# Altium PCB FCM_Integrated.PcbDoc (part 3 of 3)
Units mil, origin at the board's own origin, x right, y up, seen from the top; angles counter-clockwise.
Board outline 6000 x 4366 mil, 4 copper layers (Top Layer, Power, Ground, Bottom Layer), stack 23.756 mil thick; 165 components, 92 nets, 633 pads, 170 vias.
Unrouted connection lines stored in the file: 134.
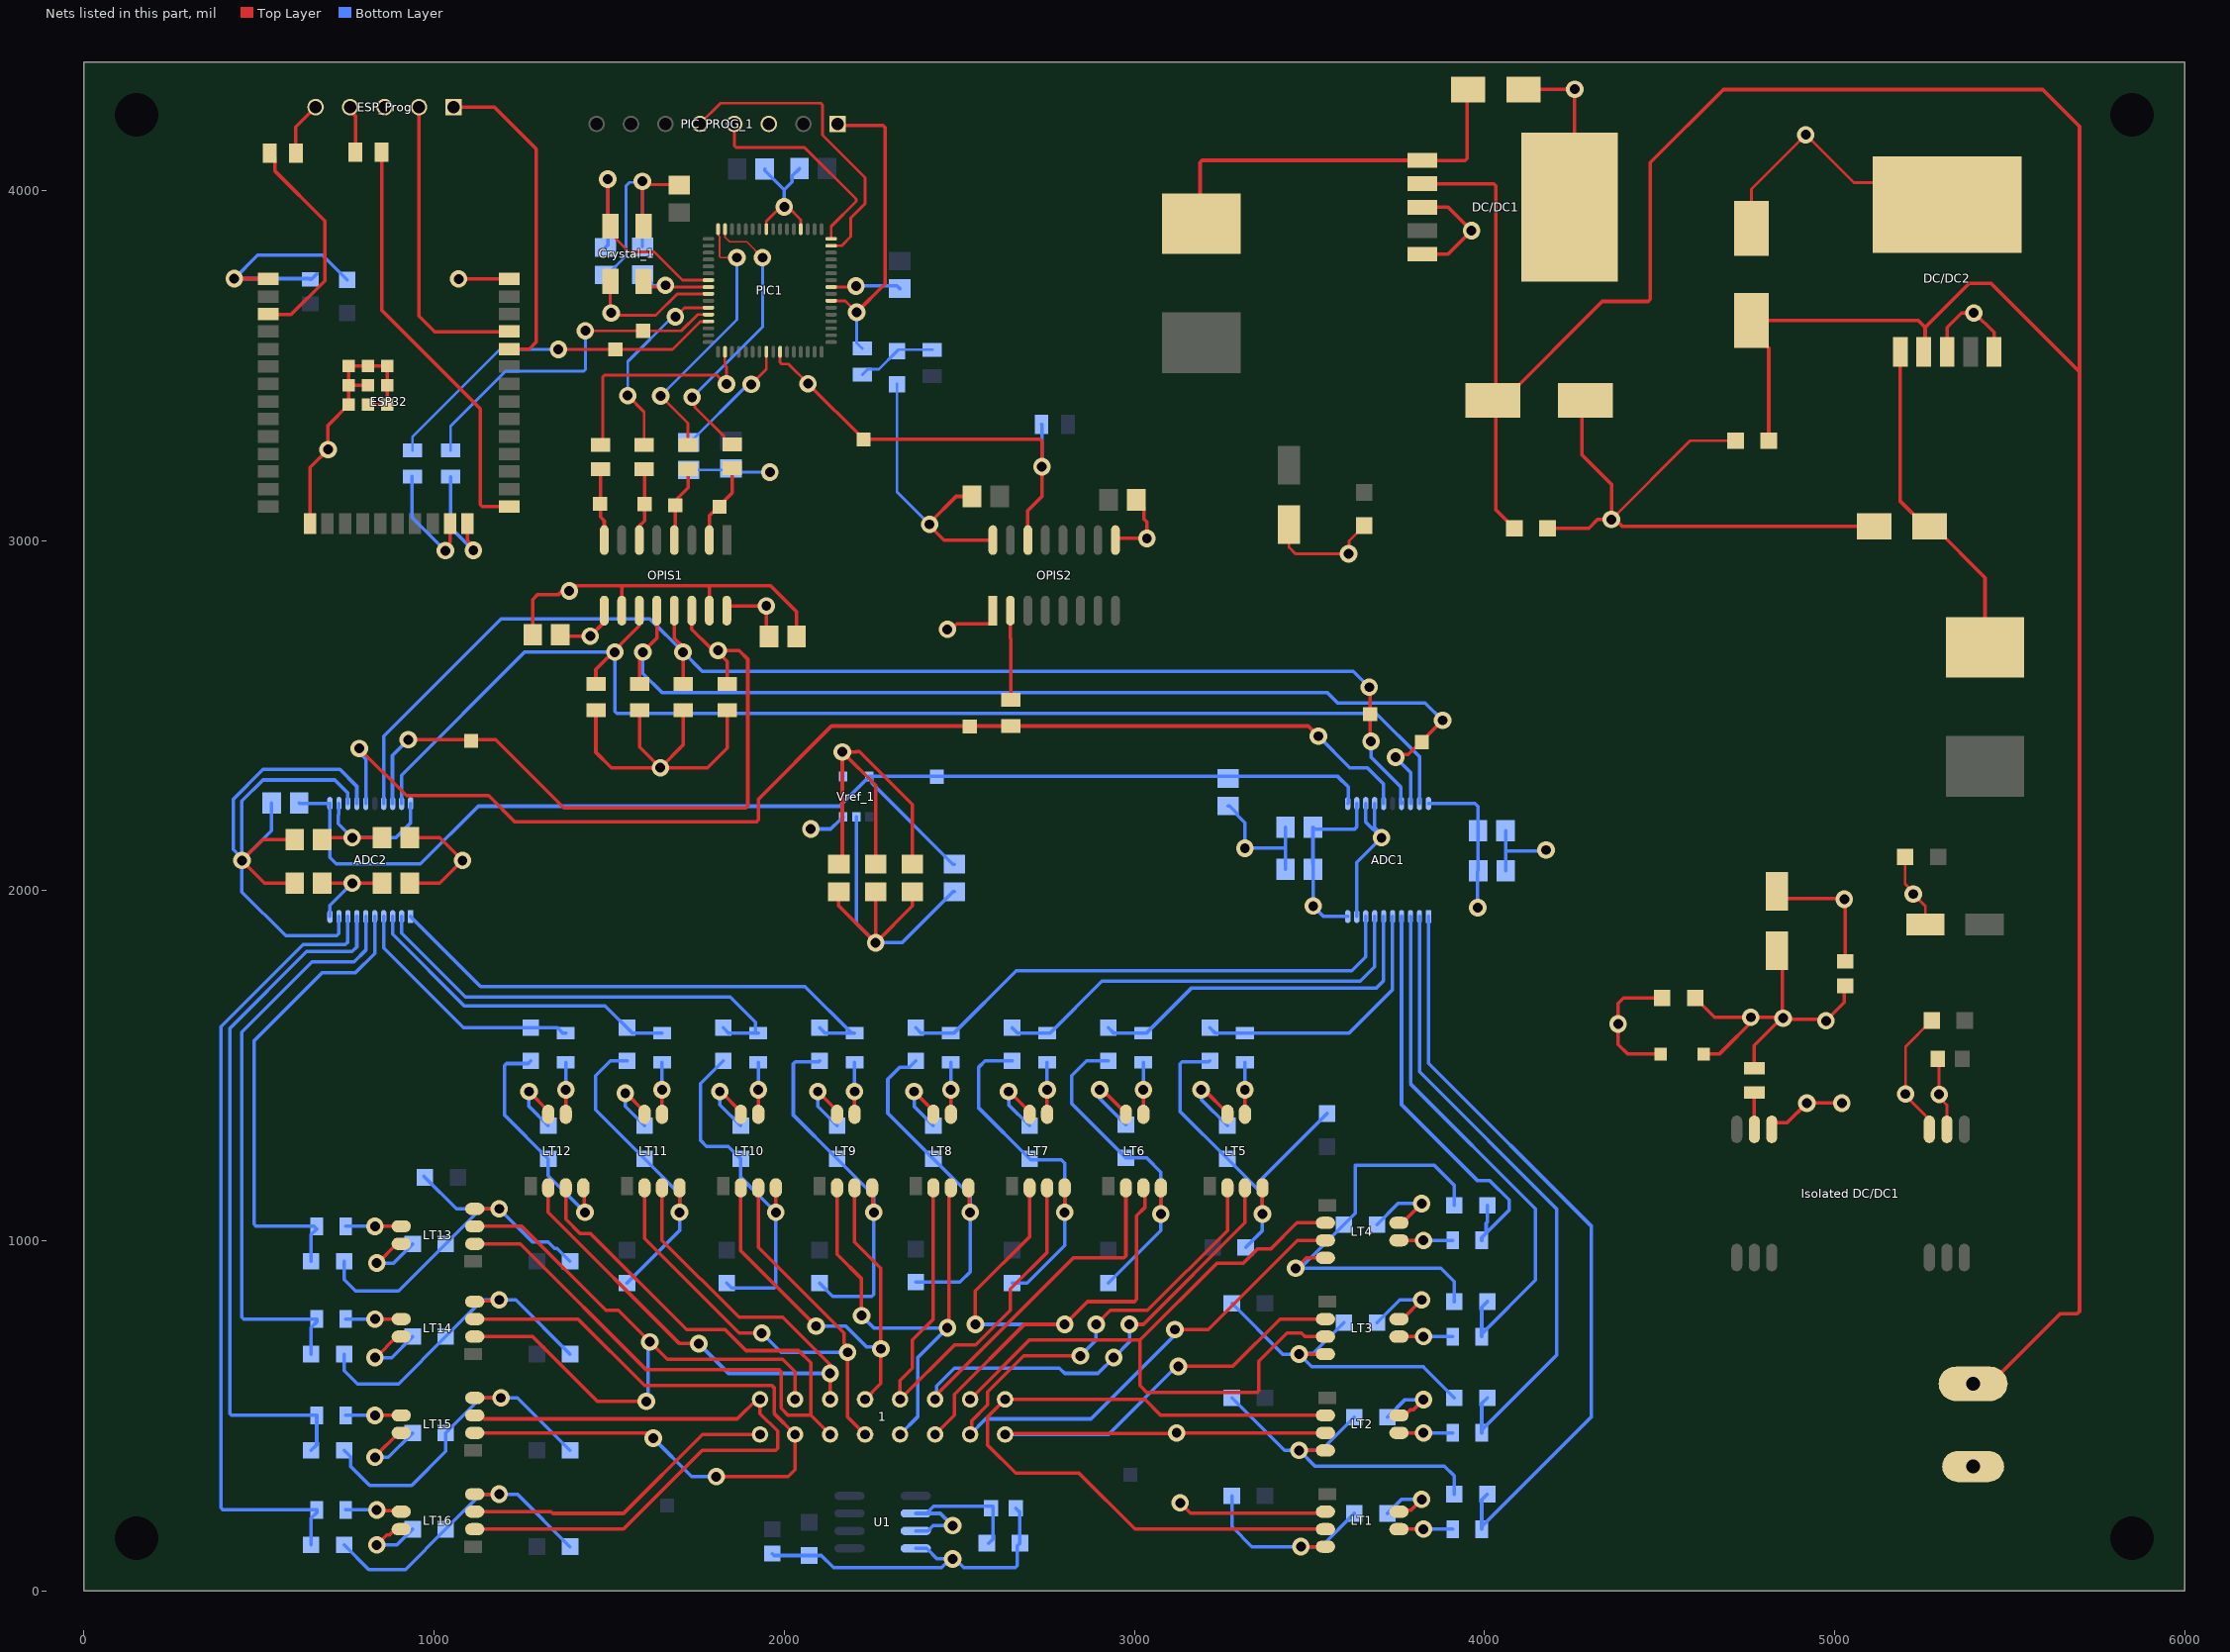
[diagram p4: the nets of this part, all layers, seen from the top]

## Via types
v1: diameter 50, hole 28, Top Layer to Bottom Layer, 170 vias

## Nets (pads, with @x,y where several pads share a name; then routed paths per layer and width w, separated by ;. In a path a pad name is that pad's centre, name@x,y a point inside that pad or via, vN(x,y) a via of type N, cw(c..) or ccw(c..) an arc to the next point about the centre after c; other vN are vias at no path point) (continued)
+5: *1.1 ADC1.10 ADC1.12 ADC1.20 ADC2.10 ADC2.12 ADC2.20 C1.1 C2.1 C3.2 C4.2 C5.2 C6.2 C10.1 C12.2 C13.2 C14.1 C15.1 C16.2 C17.2 C18.1 C19.1 C23.2 C26.2 C29.2 C32.2 C35.2 C38.2 C41.2 C44.2 C47.2 C49.2 C53.2 C55.2 C59.2 C61.2 C65.2 C67.2 C76.1 C77.1 C78.2 DIODE2.K LT1.7 LT2.7 LT3.7 LT4.7 LT5.7 LT6.7 LT7.7 LT8.7 LT9.7 LT10.7 LT11.7 LT12.7 LT13.7 LT14.7 LT15.7 LT16.7 OPIS1.10 OPIS1.15 OPIS2.1 R5.1 R6.1 R7.1 R8.1 U1.2 U1.3 Vref_1.3 Vref_1.4 | length 10591.2
  Top Layer w10: C15.1@680.37,2021 v1(766,2021) C17.2@851.63,2021 ; C14.1@680.37,2146 685.37,2151 v1(766,2151) C16.2@851.63,2151 ; v1(831,381) 831,383.53 898.47,451 LT15.7@906,451 ; v1(831,666) 833.47,666 893.47,726 LT14.7@906,726 ; v1(836,131) 864.28,159.28 872.46,159.28 889.18,176 LT16.7@906,176 ; v1(836,936) 838.47,936 893.47,991 LT13.7@906,991 ; v1(1271,1426) 1326,1371.03 LT12.7@1326,1361 ; C6.2@1281.63,2731 1281.63,2831.63 1296,2846 1356,2846 1381,2871 1541.86,2871 ; R5.1@1462,2515 1462,2395 1506,2351 v1(1646,2351) ; OPIS1.10@1536,2786 1536,2865.14 1541.86,2871 ; v1(1546,1421) 1548.53,1421 1601,1368.53 LT11.7@1601,1361 ; R6.1@1587,2515 1587,2410 v1(1646,2351) ; R7.1@1712,2515 1712,2417 v1(1646,2351) ; OPIS1.15@1786,2786 1786,2865.14 1780.14,2871 ; v1(1816,1426) 1818.53,1426 1876,1368.53 LT10.7@1876,1361 ; R8.1@1837,2515 1837,2407 1781,2351 v1(1646,2351) ; C5.2@2035.37,2726 2035.37,2796.63 1961,2871 1780.14,2871 ; v1(2096,1426) 2151,1371.03 LT9.7@2151,1361 ; C13.2@2156,2075.37 2166,2085.37 v1(2166,2396) ; C10.1@2261,2075.37 2261,2301 v1(2166,2396) ; C12.2@2366,2075.37 2366,2246 2215.14,2396.86 2206.86,2396.86 2206,2396 v1(2166,2396) ; v1(2371,1426) 2426,1371.03 LT8.7@2426,1361 ; v1(2466,2746) 2476.82,2746 2493.12,2762.3 2588.4,2762.3 2596,2769.9 OPIS2.1@2596,2799.82 ; v1(2641,1426) 2643.53,1426 2701,1368.53 LT7.7@2701,1361 ; v1(2901,1431) 2909.29,1431 2976,1364.29 LT6.7@2976,1361 ; v1(3191,1431) 3199.29,1431 3266,1364.29 LT5.7@3266,1361 ; LT1.7@3756,226 3760.78,230.78 3790.78,230.78 v1(3821,261) ; LT2.7@3756,501 3772.82,501 3789.54,517.72 3797.72,517.72 v1(3826,546) ; LT3.7@3756,776 3766.03,776 v1(3821,831) ; LT4.7@3756,1051 3766.03,1051 v1(3821,1106) ; C78.2@4602.18,1693 4657.18,1638 v1@4776,1638 ; DIODE2.K@4626.94,1533 4671,1533 v1@4776,1638 ; *1.1@4771,1493 4771,1558 v1@4851,1638 ; C77.1@4836,1828.35 4851,1813.36 v1@4851,1638 ; C76.1@5031,1728 5028.05,1725.05 5028.05,1680.05 v1(4976,1628) 4971,1633 4856,1633 v1@4851,1638 ; 1541.86,2871 1780.14,2871 ; v1@4776,1638 v1@4851,1638
  Bottom Layer w10: ADC2.10@702.46,1926 702.46,1957.46 v1(766,2021) ; ADC2.12@728.05,2248.83 727.1,2247.88 727.1,2217.1 726,2216 726,2191 v1(766,2151) 891,2151 932.77,2192.77 ADC2.20@932.77,2248.83 ; v1(831,381) 868.76,381 C61.2@938.76,451 ; v1(831,666) 878.76,666 C55.2@938.76,726 ; v1(836,131) 893.76,131 C67.2@938.76,176 ; v1(836,936) 883.76,936 C49.2@938.76,991 ; v1(1271,1426) 1271,1383.24 C65.2@1326,1328.24 ; v1(1546,1421) 1546,1383.24 C59.2@1601,1328.24 ; v1(1816,1426) 1816,1388.24 C53.2@1876,1328.24 ; v1(2076,2176) 2133,2176 2159.22,2202.22 2161.19,2202.22 2168,2209.03 Vref_1.3@2168,2211 ; v1(2096,1426) 2096,1383.24 C47.2@2151,1328.24 ; v1(2166,2396) 2167,2395 2167,2327 Vref_1.4@2168,2326 ; v1(2371,1426) 2371,1383.24 C44.2@2426,1328.24 ; U1.3@2375.49,171 2410.67,171 2425.67,186 v1(2481,186) 2446,221 U1.2@2406.98,221 ; U1.2@2375.49,221 U1.2@2406.98,221 ; C19.1@2583.76,135.03 2596,147.27 2596,241 2426.98,241 U1.2@2406.98,221 ; v1(2641,1426) 2641,1388.24 C41.2@2701,1328.24 ; v1(2901,1431) 2901,1406 C38.2@2976,1331 ; v1(3191,1431) 3191,1403.24 C35.2@3266,1328.24 ; ADC1.10@3609.82,1926 3597.91,1926 ; ADC1.12@3635.41,2248.83 3635.41,2181.77 3629.55,2175.91 3546.09,2175.91 3530.77,2175.91 3515.46,2175.91 C4.2@3510.37,2181 3510.37,2076 3511,2075.37 v1(3511,1956) 3541,1926 3586,1926 ; C29.2@3693.24,766 3758.24,831 v1(3821,831) ; C32.2@3693.24,1046 3753.24,1106 v1(3821,1106) ; C23.2@3723.24,221 3763.24,261 v1(3821,261) ; C26.2@3723.24,496 3773.24,546 v1(3826,546) ; ADC1.20@3840.13,2248.83 3972.94,2248.83 3981.63,2240.14 C3.2@3981.63,2171 3981.63,2056.63 C1.1@3982.26,2056 3981,2054.74 v1(3981,1951) ; 3586,1926 3597.91,1926 ; 3586,1926 3597.91,1926
  other v1: 4853.5,1635.5 4761,1638 1386,2856
+12: C70.2 C71.1 C79.2 C80.1 DC/DC1.2 DC/DC2.2 J1.1 | length 8846.9
  Top Layer w10: DC/DC1.2@3823,4018.86 4027.14,4018.86 4033,4013 4033,3408.78 C71.1@4024.22,3400 ; C70.2@4085.76,3035 4033,3087.76 4033,3391.22 C71.1@4024.22,3400 ; C79.2@4812.24,3285 4812.24,3549.26 4763,3598.5 C80.1@4763,3628 5240,3628 5259,3609 ; DC/DC2.2@5255.07,3538.92 5259,3542.85 5259,3609 ; J1.1@5396,591.22 5445.21,591.22 5645.99,792 5694.14,792 5700,797.86 5700,3482 ; C71.1@4024.22,3400 4053.72,3400 4336.72,3683 4468.14,3683 4474,3688.86 4474,4079 4683,4288 5595,4288 5700,4183 5700,3482 ; 5259,3609 5385,3735 5447,3735 5700,3482
CathH1: OPIS1.2 pad.1@1815,3096 R4.1 | length 245.7
  Top Layer w10: OPIS1.2@1786,2987.18 1786,3071 1851,3136 R4.1@1851,3206
CathH2: OPIS1.4 pad.1@1689,3101 R3.1 | length 233.7
  Top Layer w10: OPIS1.4@1686,2987.18 1688.91,2990.09 1688.91,3113.91 1726,3151 1726,3202.85 R3.1@1724.94,3203.91
CathH3: OPIS1.6 pad.1@1601,3104 R2.1 | length 223.4
  Top Layer w10: OPIS1.6@1586,2987.18 1586,3041 1601,3056 1601,3202.85 R2.1@1599.94,3203.91
CathH4: OPIS1.8 pad.1@1474,3105 R1.1 | length 221.3
  Top Layer w10: R1.1@1474.94,3203.91 1474.94,3067.06 1486,3056 OPIS1.8@1486,2987.18
CathL1: OPIS2.2 R11.2 | length 255.2
  Top Layer w10: OPIS2.2@2646,2799.82 2646,2721 2647,2720 R11.2@2647,2545
Cell_1_Voltage: ADC1.1 C24.2 R16.2 | length 2171.6
  Bottom Layer w10: ADC1.1@3840.13,1926 3840.13,1506.87 4306,1041 4306,497.54 R16.2@3992.34,183.87 ; R16.2@3992.34,176 R16.2@3992.34,183.87 ; C24.2@4008.24,276 3992.34,260.09 R16.2@3992.34,183.87
Cell_2_Voltage: ADC1.2 C27.2 R17.2 | length 1824.4
  Bottom Layer w10: ADC1.2@3814.54,1926 3814.54,1482.46 4206,1091 4206,672.54 R17.2@3992.34,458.87 ; R17.2@3992.34,451 R17.2@3992.34,458.87 ; C27.2@4008.24,551 3992.34,535.09 R17.2@3992.34,458.87
Cell_3_Voltage: ADC1.3 C30.2 R18.2 | length 1510.3
  Bottom Layer w10: ADC1.3@3788.95,1926 3788.95,1448.05 4146,1091 4146,887.54 R18.2@3992.34,733.87 ; R18.2@3992.34,726 R18.2@3992.34,733.87 ; C30.2@4008.24,826 3992.34,810.09 R18.2@3992.34,733.87
Cell_4_Voltage: ADC1.4 C33.2 R19.2 | length 1186.2
  Bottom Layer w10: ADC1.4@3763.36,1926 3763.36,1388.64 3981,1171 4016,1171 4071,1116 4071,1087.54 R19.2@4005.05,1021.59 ; R19.2@3992.34,1001 3992.34,1008.87 R19.2@4005.05,1021.59 ; C33.2@4008.24,1101 4008.24,1053.58 4005.05,1050.39 R19.2@4005.05,1021.59
Cell_5_Voltage: ADC1.5 C36.2 R20.2 | length 788.5
  Bottom Layer w10: C36.2@3216,1608.24 3231.91,1592.34 R20.2@3316,1592.34 3612.34,1592.34 3737.77,1717.77 ADC1.5@3737.77,1926
Cell_6_Voltage: ADC1.6 C39.2 R21.2 | length 1038.7
  Bottom Layer w10: C39.2@2926,1608.24 2941.91,1592.34 R21.2@3026,1592.34 3033.87,1592.34 3162.54,1721 3691,1721 3712.18,1742.18 ADC1.6@3712.18,1926
Cell_7_Voltage: ADC1.7 C42.2 R22.2 | length 1264.8
  Bottom Layer w10: C42.2@2651,1608.24 2666.91,1592.34 R22.2@2751,1592.34 2758.87,1592.34 2907.54,1741 3645.73,1741 3686.59,1781.86 ADC1.7@3686.59,1926
Cell_8_Voltage: ADC1.8 C45.2 R23.2 | length 1497.2
  Bottom Layer w10: C45.2@2376,1608.24 2391.91,1592.34 R23.2@2476,1592.34 2483.87,1592.34 2662.54,1771 3621,1771 3661,1811 ADC1.8@3661,1926
Cell_9_Voltage: ADC2.1 C50.2 R24.2 | length 1505.1
  Bottom Layer w10: ADC2.1@932.77,1926 1132.77,1726 2059.46,1726 R24.2@2193.13,1592.34 ; C50.2@2101,1608.24 2116.91,1592.34 R24.2@2193.13,1592.34 ; R24.2@2201,1592.34 R24.2@2193.13,1592.34
Cell_10_Voltage: ADC2.2 C56.2 R26.2 | length 1302.3
  Bottom Layer w10: ADC2.2@907.18,1926 907.18,1878.1 1089.28,1696 1846,1696 1918.13,1623.87 R26.2@1918.13,1592.34 ; C56.2@1826,1608.24 1841.91,1592.34 R26.2@1918.13,1592.34 ; R26.2@1926,1592.34 R26.2@1918.13,1592.34
Cell_11_Voltage: ADC2.3 C62.2 R28.2 | length 937.3
  Bottom Layer w10: ADC2.3@881.59,1926 881.59,1875.41 1086,1671 1488.24,1671 1566.91,1592.34 R28.2@1651,1592.34
Cell_12_Voltage: ADC2.4 C68.2 R30.2 | length 710.9
  Bottom Layer w10: ADC2.4@856,1926 856,1836 1083.76,1608.24 C68.2@1276,1608.24 1352.22,1608.24 1368.13,1592.34 R30.2@1376,1592.34
Cell_13_Voltage: ADC2.5 C51.2 R25.2 | length 1360.5
  Bottom Layer w10: C51.2@648.76,941 648.76,1017.22 664.66,1033.13 656.79,1041 491.86,1041 486,1046.86 486,1571 681,1766 776,1766 830.41,1820.41 ADC2.5@830.41,1926
Cell_14_Voltage: ADC2.6 C57.2 R27.2 | length 1683.7
  Bottom Layer w10: C57.2@648.76,676 648.76,752.22 664.66,768.13 R27.2@664.66,776 456.86,776 451,781.86 451,1596 651,1796 771,1796 804.82,1829.82 ADC2.6@804.82,1926
Cell_15_Voltage: ADC2.7 C63.2 R29.2 | length 2003.4
  Bottom Layer w10: C63.2@648.76,401 664.66,416.91 R29.2@664.66,501 421.86,501 416,506.86 416,1606 636,1826 766,1826 779.23,1839.23 ADC2.7@779.23,1926
Cell_16_Voltage: ADC2.8 C69.2 R31.2 | length 2292.3
  Bottom Layer w10: C69.2@648.76,131 648.76,207.22 664.66,223.13 R31.2@664.66,231 396.86,231 391,236.86 391,1611 626,1846 746,1846 753.64,1853.64 ADC2.8@753.64,1926
Chipsel1_HS: ADC1.18 OPIS1.12 pad.1@3821,2424 R6.2 | length 2944.7
  Top Layer w10: R6.2@1587,2590 1587,2672 v1(1596,2681) 1636,2721 OPIS1.12@1636,2786 ; v1(3746.22,2380.78) 3753.88,2388.43 3782.88,2388.43 v1(3880.72,2486.28)
  Bottom Layer w10: v1(1596,2681) 1596,2621 1651,2566 3551,2566 3581,2536 3831,2536 v1(3880.72,2486.28) ; v1(3746.22,2380.78) 3788.95,2338.05 ADC1.18@3788.95,2248.83
Chipsel1_LS: PIC1.43 R2.2 | length 552
  Top Layer w8: v1(1553,3414) 1599.94,3367.06 R2.2@1599.94,3272.81 ; v1(1689,3639) 1689.38,3639 1715.35,3664.97 PIC1.43@1783.58,3664.97
  Bottom Layer w8: v1(1553,3414) 1553,3511 1681,3639 v1(1689,3639)
Chipsel2_HS: ADC2.18 OPIS1.14 pad.1@1106,2428 R8.2 | length 2027.7
  Top Layer w10: v1(926,2431) 1176,2431 1371,2236 1890.14,2236 1896,2241.86 1896,2661 1871,2686 v1(1811,2686) 1803.35,2693.65 1788.35,2693.65 1736,2746 OPIS1.14@1736,2799.82 ; v1@1808.5,2683.5 1837,2655 R8.2@1837,2590
  Bottom Layer w10: ADC2.18@881.59,2248.83 881,2249.42 881,2386 v1(926,2431)
Chipsel2_LS: PIC1.31 R4.2 | length 822.6
  Top Layer w5: PIC1.31@1830.85,3889.35 1830.85,3866.15 1844,3853 1893,3853 v1(1938,3808)
  Top Layer w8: v1(1737,3409) 1745.04,3400.96 1745.04,3380.86 1827.44,3298.46 1827.44,3290.58 1843.13,3274.9 R4.2@1851,3274.9
  Bottom Layer w8: v1(1737,3409) 1938,3610 v1(1938,3808)
D_CLK_LS: PIC1.50 R1.2 | length 640.4
  Top Layer w8: R1.2@1474.94,3272.81 1482,3279.87 1482,3467.31 1486.69,3472 1807.67,3472 1832.67,3447 v1(1835,3447) 1835,3496 1830,3501 PIC1.50@1830,3522.64
D_In_HS: ADC1.17 ADC2.17 OPIS1.13 pad.1@3673.5,2503.5 R7.2 | length 3806.4
  Top Layer w10: OPIS1.13@1686,2786 1686,2721 1712,2695 R7.2@1712,2590 ; v1(3671,2581) 3673.5,2578.5 3673.5,2428.5 v1(3676,2426)
  Bottom Layer w10: ADC2.17@856,2248.83 856,2441 1191,2776 1616,2776 v1(1711,2681) 1766,2626 3626,2626 v1(3671,2581) ; v1(3676,2426) 3676,2381 3761,2296 3761,2256 3766,2251 3765.53,2251 ADC1.17@3763.36,2248.83
D_in_LS: PIC1.32 R3.2 | length 788.7
  Top Layer w5: PIC1.32@1811.17,3889.35 1812.32,3888.2 1812.32,3871.68 1815.5,3868.5 1815.5,3810.93 1818.43,3808 v1(1865,3808)
  Top Layer w8: v1(1647,3413) 1724.94,3335.06 R3.2@1724.94,3272.81
  Bottom Layer w8: v1(1647,3413) 1865,3631 v1(1865,3808)
D_out_HS: ADC1.15 ADC2.15 pad.1@2530,2469 R11.1 | length 3450.7
  Top Layer w10: v1(786,2406) 921,2271 1156,2271 1231,2196 1920.14,2196 1926,2201.86 1926,2261 2135,2470 3497,2470 v1(3526,2441)
  Bottom Layer w10: v1(786,2406) 786,2395.18 804.82,2376.36 ADC2.15@804.82,2248.83 ; v1(3526,2441) 3616,2351 3666,2351 3712.18,2304.82 ADC1.15@3712.18,2248.83
D_out_L: OPIS2.14 pad.1@2227,3289 PIC1.58 R9.1 | length 1278.1
  Top Layer w8: PIC1.58@1988,3525.26 1988,3508.69 1992.69,3504 2012,3504 v1(2068,3448)
  Top Layer w10: v1(2068,3448) pad.1@2227,3289 2730.14,3289 2736,3283.14 v1(2736,3211) 2736,3126 2696,3086 OPIS2.14@2696,3001
  Bottom Layer w10: R9.1@2735,3332 2736,3331 v1(2736,3211)
DCLK_HS: ADC1.19 ADC2.19 OPIS1.11 R5.2 | length 3737.5
  Top Layer w10: R5.2@1462,2590 1462,2632 1586,2756 OPIS1.11@1586,2786
  Bottom Layer w10: ADC2.19@907.18,2248.83 907.18,2329.82 1258.36,2681 v1(1516,2681) 1516,2511.86 1521.86,2506 3691,2506 3814.54,2382.46 ADC1.19@3814.54,2248.83
ESP_Boot_D: ESP32.25 R32.1 | length 1208.4
  Top Layer w10: R32.1@850,4109 850,3658 1132,3376 1132,3102.86 1137.86,3097 ESP32.25@1215,3097
ESP_Boot_P: ESP_Prog.4 R32.2 | length 135.2
  Top Layer w10: ESP_Prog.4@760,4238 760,4227.92 775,4212.92 R32.2@775,4109
ESP_Enable_D: ESP32.3 R15.2 | length 633.4
  Top Layer w10: ESP32.3@526.02,3647 528.02,3645 591,3645 688,3742 688,3913 544.69,4056.31 544.69,4092.31 R15.2@530,4107
ESP_Enable_P: ESP_Prog.5 R15.1 | length 154.4
  Top Layer w10: R15.1@605,4107 605,4181.43 ESP_Prog.5@661.57,4238
ESP_TX_BOOT: ESP32.35 ESP_Prog.2 | length 874.1
  Top Layer w10: ESP_Prog.2@956.85,4238 956.85,3641.15 1002,3596 1214,3596 ESP32.35@1215,3597
ESPout-PICin: pad.1@1597,3599 PIC1.44 R10.2 | length 1003.1
  Top Layer w8: v1(1432,3599) 1706,3599 1752.26,3645.26 PIC1.44@1783.61,3645.26
  Bottom Layer w8: R10.2@1047,3257 1047,3327 1204,3484 1427.31,3484 1432,3488.69 v1(1432,3599)
GND: 
GND_H: "Isolated DC/DC1.4" ADC1.9 ADC1.13 ADC1.14 ADC2.9 ADC2.13 ADC2.14 C1.2 C2.2 C3.1 C4.1 C5.1 C6.1 C10.2 C11.1 C12.1 C13.1 C14.2 C15.2 C16.1 C17.1 C18.2 C19.2 C20.1 C21.2 C22.1 C23.1 C24.1 C25.1 C26.1 C27.1 C28.1 C29.1 C30.1 C31.1 C32.1 C33.1 C34.1 C35.1 C36.1 C37.1 C38.1 C39.1 C40.1 C41.1 C42.1 C43.1 C44.1 C45.1 C46.1 C47.1 C48.1 C49.1 C50.1 C51.1 C52.1 C53.1 C54.1 C55.1 C56.1 C57.1 C58.1 C59.1 C60.1 C61.1 C62.1 C63.1 C64.1 C65.1 C66.1 C67.1 C68.1 C69.1 C76.2 C77.2 C78.1 C93.1 C94.1 DIODE2.A LT1.2 LT1.4 LT2.4 LT3.4 LT4.4 LT5.4 LT6.4 LT7.4 LT8.4 LT9.4 LT10.4 LT11.4 LT12.4 LT13.4 LT14.4 LT15.4 LT16.4 OPIS1.9 OPIS1.16 pad.2 U1.4 Vref_1.2 | length 23408.9
  Top Layer w10: C15.2@601.63,2021 516,2021 v1(451,2086) 511,2146 C14.2@601.63,2146 ; C17.1@930.37,2021 1016,2021 v1(1081,2086) 1016,2151 C16.1@930.37,2151 ; LT16.4@1116,276 v1(1186,276) ; LT15.4@1116,551 v1(1191,551) ; LT14.4@1116,826 1118.5,828.5 1183.5,828.5 v1(1186,831) ; LT13.4@1116,1091 v1(1186,1091) ; C6.1@1360.37,2731 1364.37,2727 v1(1446,2727) 1486,2767 OPIS1.9@1486,2799.82 ; LT12.4@1426,1151 1428.5,1148.5 1428.5,1083.5 v1(1431,1081) ; v1(1701,1081) LT11.4@1701,1151 ; OPIS1.16@1836,2799.82 1836,2805.98 1843.02,2813 v1(1949,2813) 1949,2733.63 C5.1@1956.63,2726 ; v1(1976,1081) LT10.4@1976,1151 ; C13.1@2156,1996.63 2156,1956 v1(2261,1851) ; LT9.4@2251,1151 2253.5,1148.5 2253.5,1083.5 v1(2256,1081) ; C10.2@2261,1996.63 v1(2261,1851) ; C12.1@2366,1996.63 2366,1956 v1(2261,1851) ; LT8.4@2526,1151 2528.5,1148.5 2528.5,1083.5 v1(2531,1081) ; v1(2801,1081) LT7.4@2801,1151 ; v1(3076,1076) LT6.4@3076,1151 ; v1(3131,251) 3160.78,221.22 3541.22,221.22 LT1.2@3546,226 ; v1(3366,1076) LT5.4@3366,1151 ; v1(3461,921) 3491,951 LT4.4@3546,951 ; v1(3471,401) LT2.4@3546,401 ; v1(3471,676) LT3.4@3546,676 ; v1(3476,126) LT1.4@3546,126 ; DIODE2.A@4502.93,1533 4409.86,1533 4382,1560.86 4382,1677.28 4397.72,1693 C78.1@4507.69,1693 ; 4821,1318 4821,1326.69 4830.93,1336.62 4864.62,1336.62 v1(4921,1393) v1(5021,1393) ; C77.2@4836,1997.65 4855.65,1978 5025.14,1978 5031,1972.14 C76.2@5031,1798
  Bottom Layer w10: C94.1@535.63,2250 535.63,2170.63 v1(451,2086) ; ADC2.9@728.05,1926 728.05,1876.86 722.19,1871 576,1871 451,1996 v1(451,2086) ; C69.1@743.24,131 813.24,61 918.24,61 C67.1@1033.24,176 1133.24,276 v1(1186,276) 1238.24,276 C66.1@1388.24,126 ; C63.1@743.24,401 761.87,382.38 761.87,355.13 816,301 936,301 1033.24,398.24 C61.1@1033.24,451 1133.24,551 v1(1191,551) 1238.24,551 C60.1@1388.24,401 ; C57.1@743.24,676 743.24,628.76 781,591 898.24,591 C55.1@1033.24,726 1138.24,831 v1(1186,831) 1233.24,831 C54.1@1388.24,676 ; C51.1@743.24,941 743.24,888.76 776,856 898.24,856 C49.1@1033.24,991 1133.24,1091 ; ADC2.13@753.64,2248.83 753.64,2278.36 716,2316 511,2316 451,2256 v1@451,2092.57 ; ADC2.14@779.23,2248.83 779.23,2297.77 731,2346 511,2346 426,2261 426,2117.57 v1@451,2092.57 ; C64.1@971,1183.76 C64.1@973.76,1181 1063.76,1091 1133.24,1091 ; C68.1@1276,1513.76 1268.24,1506 1206.86,1506 1201,1500.14 1201,1358.76 C65.1@1326,1233.76 1326,1186 v1(1431,1081) ; C48.1@1388.24,941 1351.43,977.81 1344.19,977.81 1326,996 1281,996 v1(1186,1091) 1133.24,1091 ; C58.1@1551,878.76 1701,1028.76 v1(1701,1081) 1701,1133.76 C59.1@1601,1233.76 1461,1373.76 1461,1471 1503.76,1513.76 C62.1@1551,1513.76 ; C56.1@1826,1513.76 1761,1448.76 1761,1286.86 1778.24,1269.62 1840.14,1269.62 C53.1@1876,1233.76 1876,1181 v1(1976,1081) 1976,871 1976.86,870.14 1971.86,865.14 1849.61,865.14 C52.1@1836,878.76 ; C21.2@1966,106 1971.25,100.75 C20.1@2071,100.75 2106.25,100.75 2141,66 2449.43,66 v1@2474.43,91 ; C46.1@2101,878.76 2138.76,841 2250.14,841 2256,846.86 v1(2256,1081) 2256,1128.76 C47.1@2151,1233.76 2026,1358.76 2026,1505.14 2031.86,1511 2098.24,1511 C50.1@2101,1513.76 ; Vref_1.2@2206,2211 2206,1906 v1(2261,1851) 2336.43,1851 2482.06,1996.63 C11.1@2486,1996.63 ; U1.4@2375.49,121 2406.98,121 2436.98,91 v1@2474.43,91 ; C43.1@2376,881.51 2501.51,881.51 2531,911 v1(2531,1081) 2531,1128.76 C44.1@2426,1233.76 2296,1363.76 2296,1461 2330.13,1495.13 2357.38,1495.13 C45.1@2376,1513.76 ; C40.1@2651,878.76 2693.76,878.76 2801,986 v1(2801,1081) 2801,1221 2791,1231 2703.76,1231 C41.1@2701,1233.76 2556,1378.76 2556,1496 2573.76,1513.76 C42.1@2651,1513.76 ; C18.2@2661,236 2673.24,223.76 C19.2@2673.24,136 2666,128.76 2666,71.86 2660.14,66 2512.57,66 2487.57,91 v1(2481,91) v1@2474.43,91 ; C37.1@2926,878.76 3076,1028.76 v1(3076,1076) 3076,1196 3036,1236 2976.51,1236 C38.1@2976,1236.51 2821,1391.51 2821,1471 2863.76,1513.76 C39.1@2926,1513.76 ; C36.1@3216,1513.76 3213.24,1511 3136.86,1511 3131,1505.14 3131,1368.76 C35.1@3266,1233.76 3366,1133.76 ; C93.1@3268,2241.63 3271.94,2241.63 3293.51,2220.06 3293.51,2216.12 3316,2193.63 v1(3316,2121) 3431.63,2121 ; C22.1@3278.76,271 3278.76,183.24 3336,126 v1(3476,126) 3533.76,126 C23.1@3628.76,221 ; C25.1@3278.76,551 3428.76,401 v1(3471,401) ; C28.1@3278.76,821 3423.76,676 v1(3471,676) ; C34.1@3318.24,981 3366,1028.76 v1(3366,1076) 3366,1133.76 ; C2.2@3431.63,2061 3431.63,2121 ; C4.1@3431.63,2181 3431.63,2121 ; C31.1@3551,1363.24 3366,1178.24 3366,1133.76 ; C29.1@3598.76,766 3511,678.24 3473.24,678.24 v1(3471,676) ; C26.1@3628.76,496 3533.76,401 v1(3471,401) ; ADC1.9@3635.41,1926 3635.41,2080.41 v1(3706,2151) ; ADC1.13@3661,2248.83 3661,2196 v1(3706,2151) ; ADC1.14@3686.59,2248.83 3686.59,2181.23 3706,2161.82 v1(3706,2151) ; C24.1@3913.76,276 3913.76,328.24 3886,356 3516,356 v1(3471,401) ; C27.1@3913.76,551 3826,638.76 3826,640.14 3506.86,640.14 v1(3471,676) ; C30.1@3913.76,826 3913.76,883.24 3876,921 v1(3461,921) 3468.65,928.65 3481.41,928.65 3631,1078.24 3631,1216 3856,1216 3913.76,1158.24 C33.1@3913.76,1101 ; C3.1@4060.37,2171 4061,2170.37 4061,2113.18 ; C1.2@4061,2056 4061,2113.18 ; v1(4176,2116) 4173.19,2113.18 4061,2113.18 ; v1(451,2086) v1@451,2092.57
  other v1: 4382,1619 5028.07,1975.07
GND_L: "Isolated DC/DC1.2" "Isolated DC/DC1.3" C7.2 C8.1 C9.1 C70.1 C71.2 C72.2 C73.1 C74.2 C75.1 C79.1 C80.2 C81.2 C82.1 C83.2 C84.2 C85.2 C86.2 C87.1 C88.2 C89.1 C90.1 C91.2 C92.1 Crystal_1.2 Crystal_1.4 DC/DC1.3 DC/DC1.5 DC/DC1.6 DC/DC2.3 DC/DC2.5 DC/DC2.6 DIODE1.A DIODE3.A ESP32.1 ESP32.15 ESP32.38 ESP32.39 ESP_Prog.3 J1.2 OPIS2.9 OPIS2.16 pad.3 PIC1.9 PIC1.20 PIC1.25 PIC1.41 PIC_PROG_1.3 | length 9561.7
  Top Layer w8: Crystal_1.2@1502.76,3739.07 1502.76,3727.26 1503,3727.02 1503,3670.69 v1@1507.69,3666 ; v1(1506,3650) 1513,3643 1633,3643 1694.32,3704.32 PIC1.41@1783.61,3704.32 ; v1@1589,4020 v1(1595,4026) ; Crystal_1.4@1597.24,3884.74 1595,3886.98 v1(1595,4026) ; C92.1@1695.49,4010.51 1689,4017 1607.43,4017 1598.43,4026 v1(1595,4026) ; PIC1.25@1948.96,3889.35 1949.13,3889.53 1949.13,3912.13 1990,3953 v1(2000,3953) 2011,3953 2047.39,3916.61 PIC1.20@2047.39,3889.35 ; PIC1.9@2134,3724 2134.17,3724.17 2202.17,3724.17 v1(2205,3727) ; C72.2@3442,3045.36 3442,2980 3460,2962 v1(3612,2962) 3613.24,2963.24 3613.24,2999 C73.1@3657,3042.76 ; v1(4363,3060) 4588,3285 C79.1@4717.76,3285 ; C80.2@4763,3891.78 4763,4004 v1(4918,4159) 5055,4022 5259,4022 DC/DC2.6@5322,3959 ; C82.1@5201.76,2096 5201.76,2019.08 5225,1995.84 v1(5225,1990) 5259.71,1955.29 C81.2@5259.71,1903 ; 5271,1318 5271,1346.31 5203,1414.31 v1(5203,1419) 5203,1554.18 C75.1@5277.82,1629 ; C74.2@5295.06,1519 5299,1515.06 v1(5299,1418) 5299,1409.67 5321,1387.67 5321,1318
  Top Layer w10: v1(429,3748) 525.02,3748 ESP32.1@526.02,3747 ; ESP32.15@645.51,3047.79 645.51,3208.51 v1(697,3260) 697,3328.61 ESP32.39@756.34,3387.94 ESP32.39@756.34,3443.06 ; ESP32.39@811.46,3387.94 ESP32.39@866.57,3387.94 ESP32.39@866.57,3443.06 ESP32.39@866.57,3498.18 ESP32.39@811.46,3498.18 ESP32.39@756.34,3498.18 ESP32.39@756.34,3443.06 ; ESP32.39@811.46,3443.06 ESP32.39@756.34,3443.06 ; v1(1070,3747) ESP32.38@1215,3747 ; C9.1@2536.63,3126 2491,3126 2415.14,3050.14 v1(2415.14,3046) 2415.14,3041.86 2456,3001 OPIS2.16@2596,3001 ; OPIS2.9@2946,3001 2951,3006 v1(3036,3006) 3036,3052.96 3026.94,3062.01 3026.94,3094.43 C8.1@3005.37,3116 ; DC/DC1.5@3823,3818.07 3896.07,3818.07 v1(3963,3885) 3896.07,3951.93 DC/DC1.3@3823,3951.93 ; DIODE1.A@4112,4288 4113,4289 v1(4258,4289) ; C70.1@4180.24,3035 4298,3035 4323,3060 v1(4363,3060) ; DC/DC1.6@4243.08,3951.93 4258,3966.85 4258,4287 v1@4257,4288 ; C71.2@4288,3400 4278,3390 4278,3245 4363,3160 v1(4363,3060) ; DIODE3.A@5117.8,3044.8 DIODE3.A@5113,3040 4393.82,3040 4373.82,3060 v1(4363,3060) ; DC/DC2.3@5322,3538.92 5322,3609.14 5362.86,3650 5400,3650 5455.86,3594.14 DC/DC2.5@5455.86,3538.92
  Bottom Layer w8: C87.1@1490.02,3758.63 1493.95,3758.63 1548,3812.68 1548,4013 1558,4023 1592,4023 v1(1595,4026) C86.2@1595.02,3838.37 ; C88.2@1727,3201.63 1844,3201.63 C89.1@1848,3205.63 1858.63,3195 v1(1959,3195) ; C84.2@2322,3446.51 2322,3139.14 v1(2415.14,3046)
  Bottom Layer w10: C83.2@664.62,3761.67 648.95,3746 C83.2@646,3746 644,3748 v1(429,3748) 496,3815 681.24,3815 C7.2@752,3744.24 ; C90.1@1944.37,4061 1944.37,4057.06 2000,4001.43 ; v1(2000,3953) 2000,4001.43 ; C91.2@2043.63,4062 2022.95,4041.32 2022.95,4024.38 2000,4001.43 ; v1(2205,3727) 2322.63,3727 C85.2@2330,3719.63
  other v1: 5398,3650
MCLR: PIC1.7 PIC_PROG_1.1 R14.2 | length 896.7
  Top Layer w8: PIC1.7@2134,3684.63 2174.37,3684.63 v1(2207,3652)
  Top Layer w10: PIC_PROG_1.1@2152.85,4190 2157.85,4185 2282.14,4185 2288,4179.14 2288,3733 v1(2207,3652)
  Bottom Layer w8: v1(2207,3652) 2207,3564.69 2222.69,3549 R14.2@2223,3549
Net1_1: 1.1 LT1.3 LT2.2 | length 2149.7
  Top Layer w10: LT1.3@3546,176 3001.67,176 2841.67,336 2661,336 2581,416 2581,496.67 1.1@2631,546.67 3030.33,546.67 3076,501 LT2.2@3546,501
Net1_2: 1.2 LT2.3 LT3.2 | length 1983.5
  Top Layer w10: 1.2@2631,446.67 2633.17,448.84 3118.84,448.84 v1(3121,451) LT2.3@3546,451 ; v1(3126,641) 3281,641 3416,776 LT3.2@3546,776
  Bottom Layer w10: 1.2@2633.17,448.84 1.2@2631,446.67 2926.67,446.67 v1@3131,651 ; v1@3118.84,448.84 v1(3121,451)
Net1_3: 1.3 LT3.3 LT4.2 | length 2016
  Top Layer w10: 1.3@2531,546.67 2700.33,716 3016,716 ; LT3.3@3546,726 3487.59,726 3477.59,736 3436,736 3356,656 3356,571.86 3350.14,566 3036,566 3016,586 3016,716 ; LT4.2@3546,1051 3464.65,1051 3389.65,976 3351,976 3311,936 3236,936 3016,716
Net1_4: 1.4 LT4.3 LT5.2 | length 2429.8
  Top Layer w10: 1.4@2531,446.67 2535.29,450.96 2535.29,485.29 2581,531 2581,568.39 2683.61,671 v1(2846,671) ; v1(2891,761) 2931,801 3037.72,801 3266,1029.28 LT5.2@3266,1151 ; v1(3116,746) 3211,746 3466,1001 LT4.3@3546,1001
  Bottom Layer w10: 1.4@2531,446.67 2575.33,491 2876,491 3116,731 v1(3116,746) v1@3116,756 ; v1(2846,671) 2891,716 v1(2891,761)
Net1_5: 1.5 LT5.3 LT6.2 | length 2170.2
  Top Layer w10: 1.5@2431,546.67 2431,556 2826,951 2970.14,951 2976,956.86 LT6.2@2976,1151 ; v1(2986,761) 3026,761 3316,1051 LT5.3@3316,1151
  Bottom Layer w10: 1.5@2431,546.67 2435.29,550.96 2435.29,585.29 2486,636 2786,636 2801,621 2896,621 v1(2941,666) 2986,711 v1(2986,761)
Net1_6: 1.6 LT6.3 LT7.2 | length 1810.1
  Top Layer w10: 1.6@2431,446.67 2486,501.67 2486,561 2686,761 v1(2801,761) 2866,826 3000.14,826 3006,831.86 3006,1071 3031,1096 3031,1109.18 3030.78,1109.39 3030.78,1146.22 LT6.3@3026,1151 ; v1(2546,761) 2546,856 2701,1011 LT7.2@2701,1151
  Bottom Layer w10: v1(2546,761) v1(2801,761)
Net1_7: 1.7 LT7.3 LT8.2 | length 1457.5
  Top Layer w10: LT8.2@2426,1151 2426,776 2366,716 2366,636 2331,601 1.7@2331,546.67 2486.71,702.38 2547.38,702.38 2646,801 2646,861.67 2751,966.67 LT7.3@2751,1151
Net1_8: 1.8 LT8.3 LT9.2 | length 1417.9
  Top Layer w10: LT9.2@2151,1151 2151,961 2221,891 v1(2221,786) ; v1(2466,751) 2471.22,756.22 2471.22,1146.22 LT8.3@2476,1151
  Bottom Layer w10: v1(2221,786) 2256,751 v1(2466,751) 2381,666 2381,496.67 1.8@2331,446.67
Net1_9: 1.9 LT9.3 LT10.2 | length 1350
  Top Layer w10: LT10.2@1876,1151 1876,971 v1(2091,756) ; LT9.3@2201,1151 2201,996 2276,921 v1(2276,691) 2276,591.67 1.9@2231,546.67
  Bottom Layer w10: v1(2091,756) 2176,756 2236,696 2271,696 v1(2276,691)
Net1_10: 1.10 LT10.3 LT11.2 | length 1690.3
  Top Layer w10: LT11.2@1601,1151 1601,1006 1871,736 v1(1936,736) ; LT10.3@1926,1151 1926,981 2171,736 2171,706.86 2173.35,704.51 2173.35,688.65 v1(2181,681) 2181,496.67 1.10@2231,446.67
  Bottom Layer w10: v1(1936,736) 1991,681 v1(2181,681)
Net1_11: 1.11 LT11.3 LT12.2 | length 1941.9
  Top Layer w10: LT12.2@1326,1151 1326,1081 1701,706 v1(1756,706) ; LT11.3@1651,1151 1651,1001 1871,781 1996,781 2131,646 v1(2131,621) 1.11@2131,546.67
  Bottom Layer w10: v1(1756,706) 1841,621 v1(2131,621)
Net1_12: 1.12 LT12.3 LT13.2 | length 2410.6
  Top Layer w10: LT13.2@1116,991 1246,991 1606,631 1985.14,631 1991,625.14 1991,521 2010.33,501.67 2076,501.67 ; LT12.3@1376,1151 1376,1061 1416,1021 1446,1021 1721,746 1831,746 1891,686 2041,686 2076,651 2076,501.67 ; 1.12@2131,446.67 2076,501.67
Net1_13: 1.13 LT13.3 LT14.2 | length 1907
  Top Layer w10: LT14.2@1116,726 1281,726 1466,541 v1(1606,541) ; LT13.3@1116,1041 1251,1041 1491,801 1526,801 1666,661 1996,661 2031,626 1.13@2031,546.67
  Bottom Layer w10: v1(1606,541) 1611,546 1611,706 v1(1616,711)
Net1_14: 1.14 LT14.3 LT15.2 | length 2170.2
  Top Layer w10: LT15.2@1116,451 1611,451 v1(1626,436) ; LT14.3@1116,776 1411,776 1601,586 1965.14,586 1971,580.14 1971,506.67 1.14@2031,446.67 2031,346 2011,326 v1(1806,326)
  Bottom Layer w10: v1(1626,436) 1736,326 v1(1806,326)
Net1_15: 1.15 LT15.3 LT16.2 | length 1963.3
  Top Layer w10: LT16.2@1116,176 1541,176 1766,401 1975.14,401 1981,406.86 1981,456 1931,506 1.15@1931,546.67 1921.67,546.67 1866,491 1142.82,491 1132.82,501 LT15.3@1116,501
Net1_16: 1.16 LT16.3 | length 910.5
  Top Layer w10: LT16.3@1116,226 1334.41,226 1339.41,221 1541,221 1766.67,446.67 1.16@1931,446.67
Net*1_2: "Isolated DC/DC1.5" *1.2 | length 113.6
  Top Layer w10: 4771,1318 *1.2@4771,1423 *1.2@4777.06,1416.94
NetC84_1: C84.1 R13.1 R14.1 | length 229.4
  Bottom Layer w8: R14.1@2223,3474 2238.69,3489.69 2270.69,3489.69 C84.1@2322,3541 2326,3545 R13.1@2423,3545
NetC86_1: C86.1 Crystal_1.3 PIC1.40 | length 268.4
  Top Layer w8: Crystal_1.3@1597.24,3727.26 1600.5,3724 PIC1.40@1783.61,3724
  Bottom Layer w8: C86.1@1595.02,3759.63 1598.95,3759.63 1621.53,3737.06 1621.53,3733.69 1626.21,3729 v1(1661,3729)
NetC87_2: C87.2 Crystal_1.1 PIC1.39 | length 690.4
  Top Layer w8: Crystal_1.1@1502.76,3884.74 1502.76,3877.93 1556.69,3824 1629,3824 1709.32,3743.68 PIC1.39@1783.61,3743.68
  Top Layer w10: v1(1496,4032) 1496,3891.5 Crystal_1.1@1502.76,3884.74
  Bottom Layer w10: C87.2@1490.02,3837.37 1496,3843.35 v1(1496,4032)
NetC88_1: C88.1 PIC1.56 | length 358.4
  Top Layer w8: v1(1906,3446) 1949,3489 1949,3538.92 PIC1.56@1948.96,3538.96
  Bottom Layer w8: C88.1@1727,3280.37 1730.94,3280.37 1896.57,3446 v1(1906,3446)
NetDC/DC1_1: DC/DC1.1 DIODE1.K L1.1 | length 1137.3
  Top Layer w10: L1.1@3192,3905 3188,3909 3188,4079.93 3193.86,4085.79 DC/DC1.1@3823,4085.79 ; DC/DC1.1@3823.79,4085 3945.14,4085 3951,4090.86 DIODE1.K@3951,4284.51
NetDC/DC2_1: DC/DC2.1 DIODE3.K L2.1 | length 957.9
  Top Layer w10: DC/DC2.1@5188.14,3538.92 5188.14,3111.79 5259.93,3040 DIODE3.K@5271.74,3040 5283.55,3040 5430,2893.55 L2.1@5430,2695
NetESP32_23: ESP32.23 R12.1 | length 333.8
  Top Layer w10: v1(1032,2971) 1032,2981.82 1045.71,2995.53 ESP32.23@1045.71,3047.79
  Bottom Layer w10: R12.1@937,3183 937,3066 v1(1032,2971)
NetESP32_24: ESP32.24 R10.1 | length 319.5
  Top Layer w10: ESP32.24@1095.71,3047.79 1095.71,2999.12 1112,2982.82 v1(1112,2972)
  Bottom Layer w10: R10.1@1047,3182 1047,3037 v1(1112,2972)
NetESP32_34: ESP32.34 ESP_Prog.1 | length 922.8
  Top Layer w10: ESP_Prog.1@1055.28,4238 1172.14,4238 1292,4118.14 1292,3567 1272,3547 ESP32.34@1215,3547
NetLT1_6: LT1.6 R16.1 | length 153.7
  Top Layer w10: LT1.6@3756,176 v1(3826,176)
  Bottom Layer w10: v1(3826,176) R16.1@3909.66,176
NetLT2_6: LT2.6 R17.1 | length 153.7
  Top Layer w10: LT2.6@3756,451 v1(3826,451)
  Bottom Layer w10: v1(3826,451) R17.1@3909.66,451
NetLT3_6: LT3.6 R18.1 | length 153.7
  Top Layer w10: LT3.6@3756,726 v1(3826,726)
  Bottom Layer w10: v1(3826,726) R18.1@3909.66,726
NetLT4_6: LT4.6 R19.1 | length 153.7
  Top Layer w10: LT4.6@3756,1001 v1(3826,1001)
  Bottom Layer w10: v1(3826,1001) R19.1@3909.66,1001
NetLT5_6: LT5.6 R20.1 | length 158.7
  Top Layer w10: LT5.6@3316,1361 v1(3316,1431)
  Bottom Layer w10: v1@3316,1421 v1(3316,1431) R20.1@3316,1509.66
NetLT6_6: LT6.6 R21.1 | length 158.7
  Top Layer w10: LT6.6@3026,1361 v1(3026,1431)
  Bottom Layer w10: v1@3026,1421 v1(3026,1431) R21.1@3026,1509.66
NetLT7_6: LT7.6 R22.1 | length 158.7
  Top Layer w10: LT7.6@2751,1361 v1(2751,1431)
  Bottom Layer w10: v1@2751,1421 v1(2751,1431) R22.1@2751,1509.66
NetLT8_6: LT8.6 R23.1 | length 158.7
  Top Layer w10: LT8.6@2476,1361 v1(2476,1431)
  Bottom Layer w10: v1@2476,1421 v1(2476,1431) R23.1@2476,1509.66
NetLT9_6: LT9.6 R24.1 | length 148.7
  Top Layer w10: LT9.6@2201,1361 v1(2201,1426)
  Bottom Layer w10: v1(2201,1426) R24.1@2201,1509.66
NetLT10_6: LT10.6 R26.1 | length 158.7
  Top Layer w10: LT10.6@1926,1361 v1(1926,1431)
  Bottom Layer w10: v1@1926,1421 v1(1926,1431) R26.1@1926,1509.66
NetLT11_6: LT11.6 R28.1 | length 158.7
  Top Layer w10: LT11.6@1651,1361 v1(1651,1431)
  Bottom Layer w10: v1@1651,1421 v1(1651,1431) R28.1@1651,1509.66
NetLT12_6: LT12.6 R30.1 | length 158.7
  Top Layer w10: LT12.6@1376,1361 v1(1376,1431)
  Bottom Layer w10: v1@1376,1421 v1(1376,1431) R30.1@1376,1509.66
NetLT13_6: LT13.6 R25.1 | length 158.7
  Top Layer w10: v1(831,1041) LT13.6@906,1041
  Bottom Layer w10: R25.1@747.34,1041 v1(831,1041)
NetLT14_6: LT14.6 R27.1 | length 168.7
  Top Layer w10: v1(831,776) LT14.6@906,776
  Bottom Layer w10: R27.1@747.34,776 v1(831,776) v1@841,776
NetLT15_6: LT15.6 R29.1 | length 168.7
  Top Layer w10: v1(831,501) LT15.6@906,501
  Bottom Layer w10: R29.1@747.34,501 v1(831,501) v1@841,501
NetLT16_6: LT16.6 R31.1 | length 160.7
  Top Layer w10: v1(836,231) 838.5,228.5 903.5,228.5 LT16.6@906,226
  Bottom Layer w10: R31.1@747.34,231 v1(836,231)
PGEC1: PIC1.15 PIC_PROG_1.5 | length 886.8
  Top Layer w8: PIC_PROG_1.5@1759.15,4190 1818.15,4249 2104.31,4249 2109,4244.31 2109,4158 2231,4036 2231,3962 2190,3921 2190,3868 2164.11,3842.11 PIC1.15@2134,3842.11
PGED1: PIC1.16 PIC_PROG_1.4 | length 616.8
  Top Layer w8: PIC_PROG_1.4@1857.57,4190 1857.57,4127.69 1862.26,4123 2058,4123 2205.69,3975.31 2205.69,3968.69 2134,3897 PIC1.16@2134,3861.8
PICout-ESPin: pad.1@1517.84,3545.76 PIC1.45 R12.2 | length 1022.8
  Top Layer w8: v1(1355,3546) 1681,3546 1760.4,3625.4 1783.43,3625.4 PIC1.45@1783.61,3625.57 PIC1.45@1783.78,3625.4
  Top Layer w10: v1@1354,3547 v1(1355,3546)
  Bottom Layer w8: R12.2@938,3257 938,3296 1188,3546 v1(1355,3546)
V_Ref: ADC1.11 ADC2.11 C11.2 C93.2 C94.2 pad.1@2436,2325 Vref_1.5 | length 3677.5
  Bottom Layer w10: C94.2@614.37,2250 615.54,2248.83 ADC2.11@702.46,2248.83 702.46,2094.54 721,2076 961,2076 1126,2241 2158,2241 2234.22,2317.22 2236.19,2317.22 2243,2324.03 Vref_1.5@2243,2326 ; C11.2@2486,2075.37 2482.06,2075.37 2249.81,2307.62 2249.81,2319.19 Vref_1.5@2243,2326 ; ADC1.11@3609.82,2248.83 3610.77,2249.78 3610.77,2282.35 3611,2282.58 3611,2296 3581,2326 Vref_1.5@2243,2326
pads on no net: "Isolated DC/DC1.6" "Isolated DC/DC1.7" "Isolated DC/DC1.8" "Isolated DC/DC1.9" "Isolated DC/DC1.10" "Isolated DC/DC1.11" "Isolated DC/DC1.12" ADC1.16 ADC2.16 ESP32.4 ESP32.5 ESP32.7 ESP32.8 ESP32.9 ESP32.10 ESP32.11 ESP32.12 ESP32.13 ESP32.14 ESP32.16 ESP32.17 ESP32.18 ESP32.19 ESP32.20 ESP32.21 ESP32.22 ESP32.26 ESP32.27 ESP32.28 ESP32.29 ESP32.30 ESP32.31 ESP32.32 ESP32.33 ESP32.36 ESP32.37 OPIS2.3 OPIS2.4 OPIS2.5 OPIS2.6 OPIS2.7 OPIS2.8 OPIS2.11 OPIS2.12 OPIS2.13 PIC1.1 PIC1.2 PIC1.3 PIC1.4 PIC1.5 PIC1.6 PIC1.8 PIC1.11 PIC1.12 PIC1.13 PIC1.14 PIC1.17 PIC1.18 PIC1.21 PIC1.22 PIC1.23 PIC1.24 PIC1.27 PIC1.28 PIC1.29 PIC1.30 PIC1.33 PIC1.34 PIC1.36 PIC1.37 PIC1.42 PIC1.46 PIC1.47 PIC1.48 PIC1.49 PIC1.51 PIC1.52 PIC1.53 PIC1.54 PIC1.55 PIC1.59 PIC1.60 PIC1.61 PIC1.62 PIC1.63 PIC1.64 PIC_PROG_1.6 PIC_PROG_1.7 PIC_PROG_1.8 U1.1 U1.5 U1.7 U1.8 Vref_1.1

## Polygon pours and split planes (outlines as drawn)
+5 on Power (split plane): 5144.95,20.1 20.1,20.1 20.1,2903.43 5144.95,2903.44
+3V3 on Power (split plane): 5979.9,20.1 5157.05,20.1 5157.05,2906.57 5157.55,2907.22 5158.31,2909.04 5158.56,2911 5158.31,2912.96 5157.55,2914.78 5156.35,2916.35 5154.78,2917.55 5152.96,2918.31 5151,2918.56 20.1,2918.56 20.1,4345.9 5979.9,4345.9
GND_H on Ground (split plane): 5144.95,20.1 20.1,20.1 20.1,2903.43 5144.95,2903.44
GND_L on Ground (split plane): 5979.9,20.1 5157.05,20.1 5157.05,2906.57 5157.55,2907.22 5158.31,2909.04 5158.56,2911 5158.31,2912.96 5157.55,2914.78 5156.35,2916.35 5154.78,2917.55 5152.96,2918.31 5151,2918.56 20.1,2918.56 20.1,4345.9 5979.9,4345.9

## Other copper
Power (plane layer: these items are gaps in the copper):
  lines w12: 5151,0 5151,2911
  lines w15: 0,2911 5151,2911
Ground (plane layer: these items are gaps in the copper):
  lines w12: 5151,0 5151,2911
  lines w15: 0,2911 5151,2911